# Altium PCB estop12.PcbDoc
Units mm, origin at the board's own origin, x right, y up, seen from the top; angles counter-clockwise.
Board outline 59.94 x 46.23 mm, 2 copper layers (Top Layer, Bottom Layer); 38 components, 12 nets, 101 pads, 0 vias.
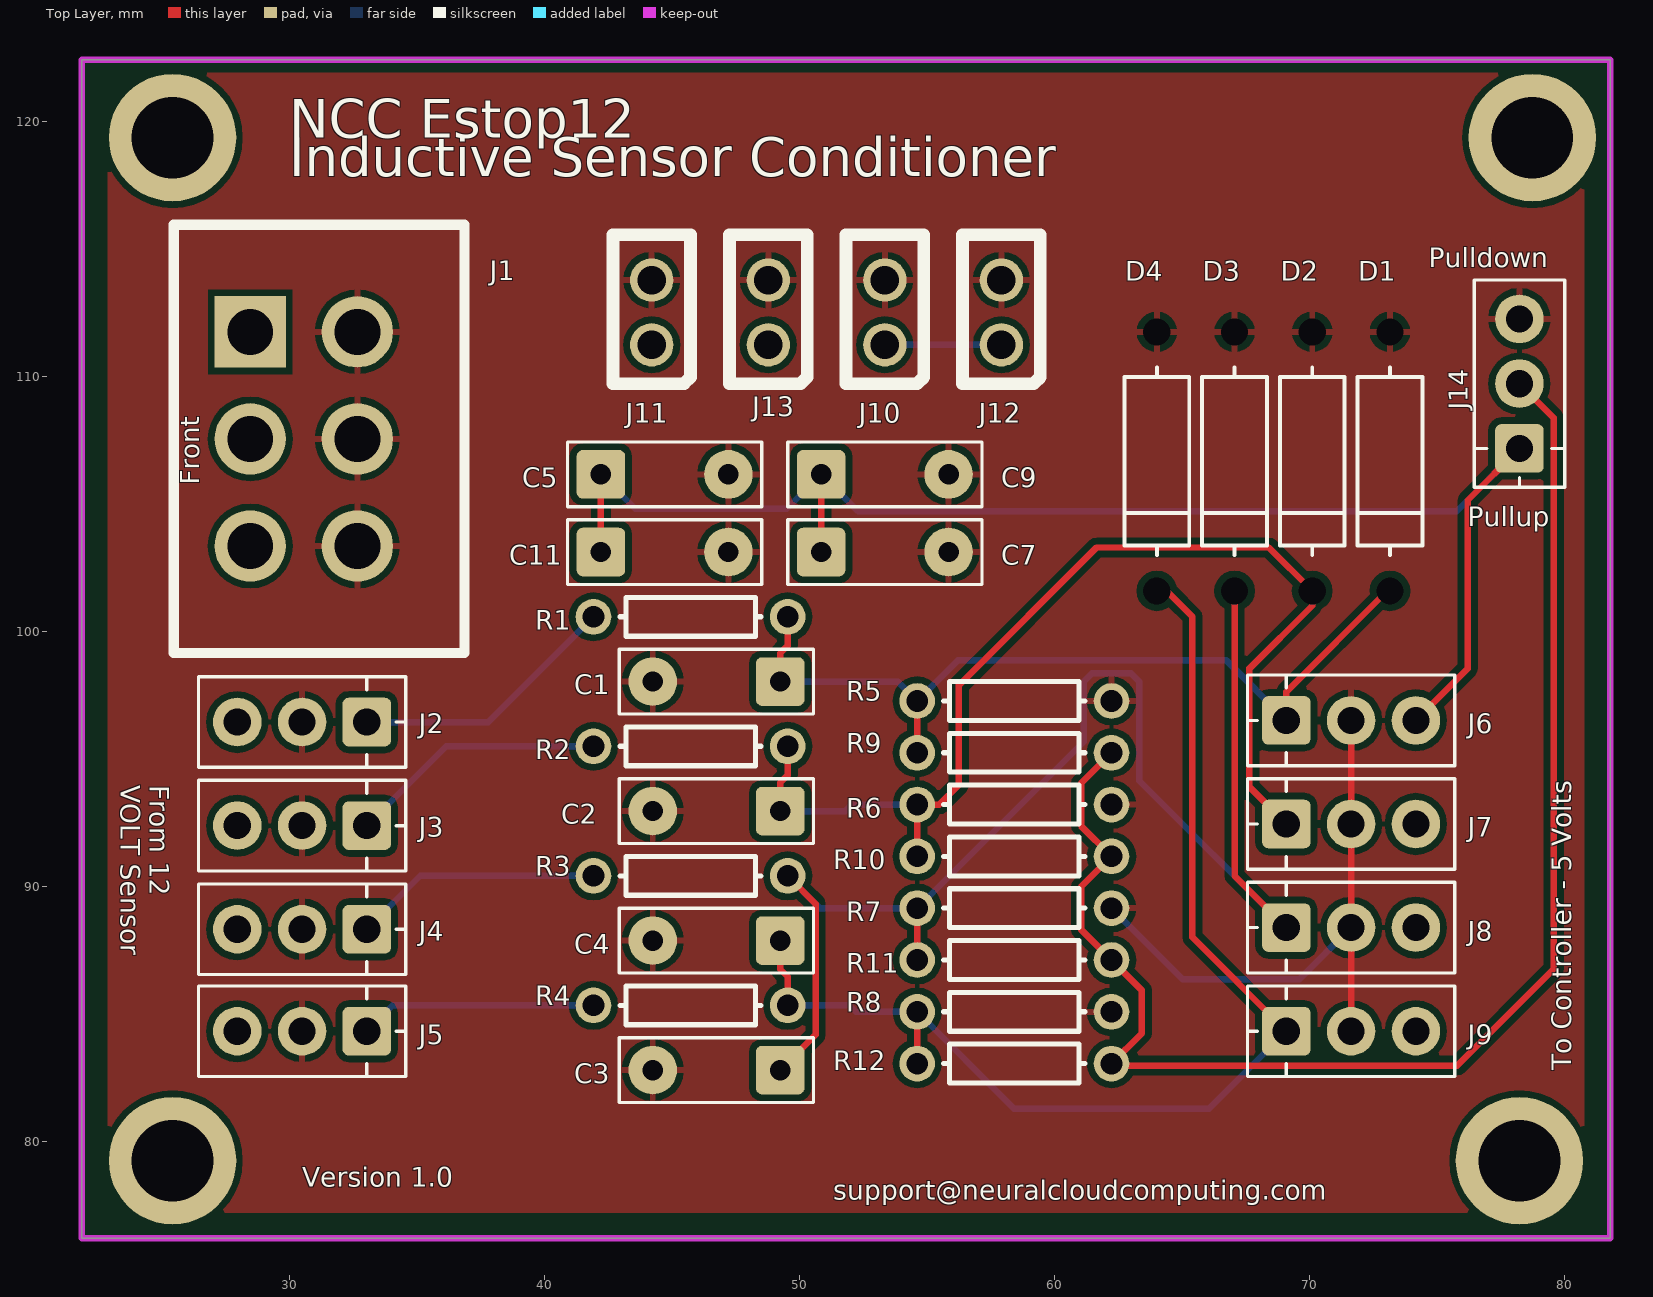
[diagram p0: Top Layer view]
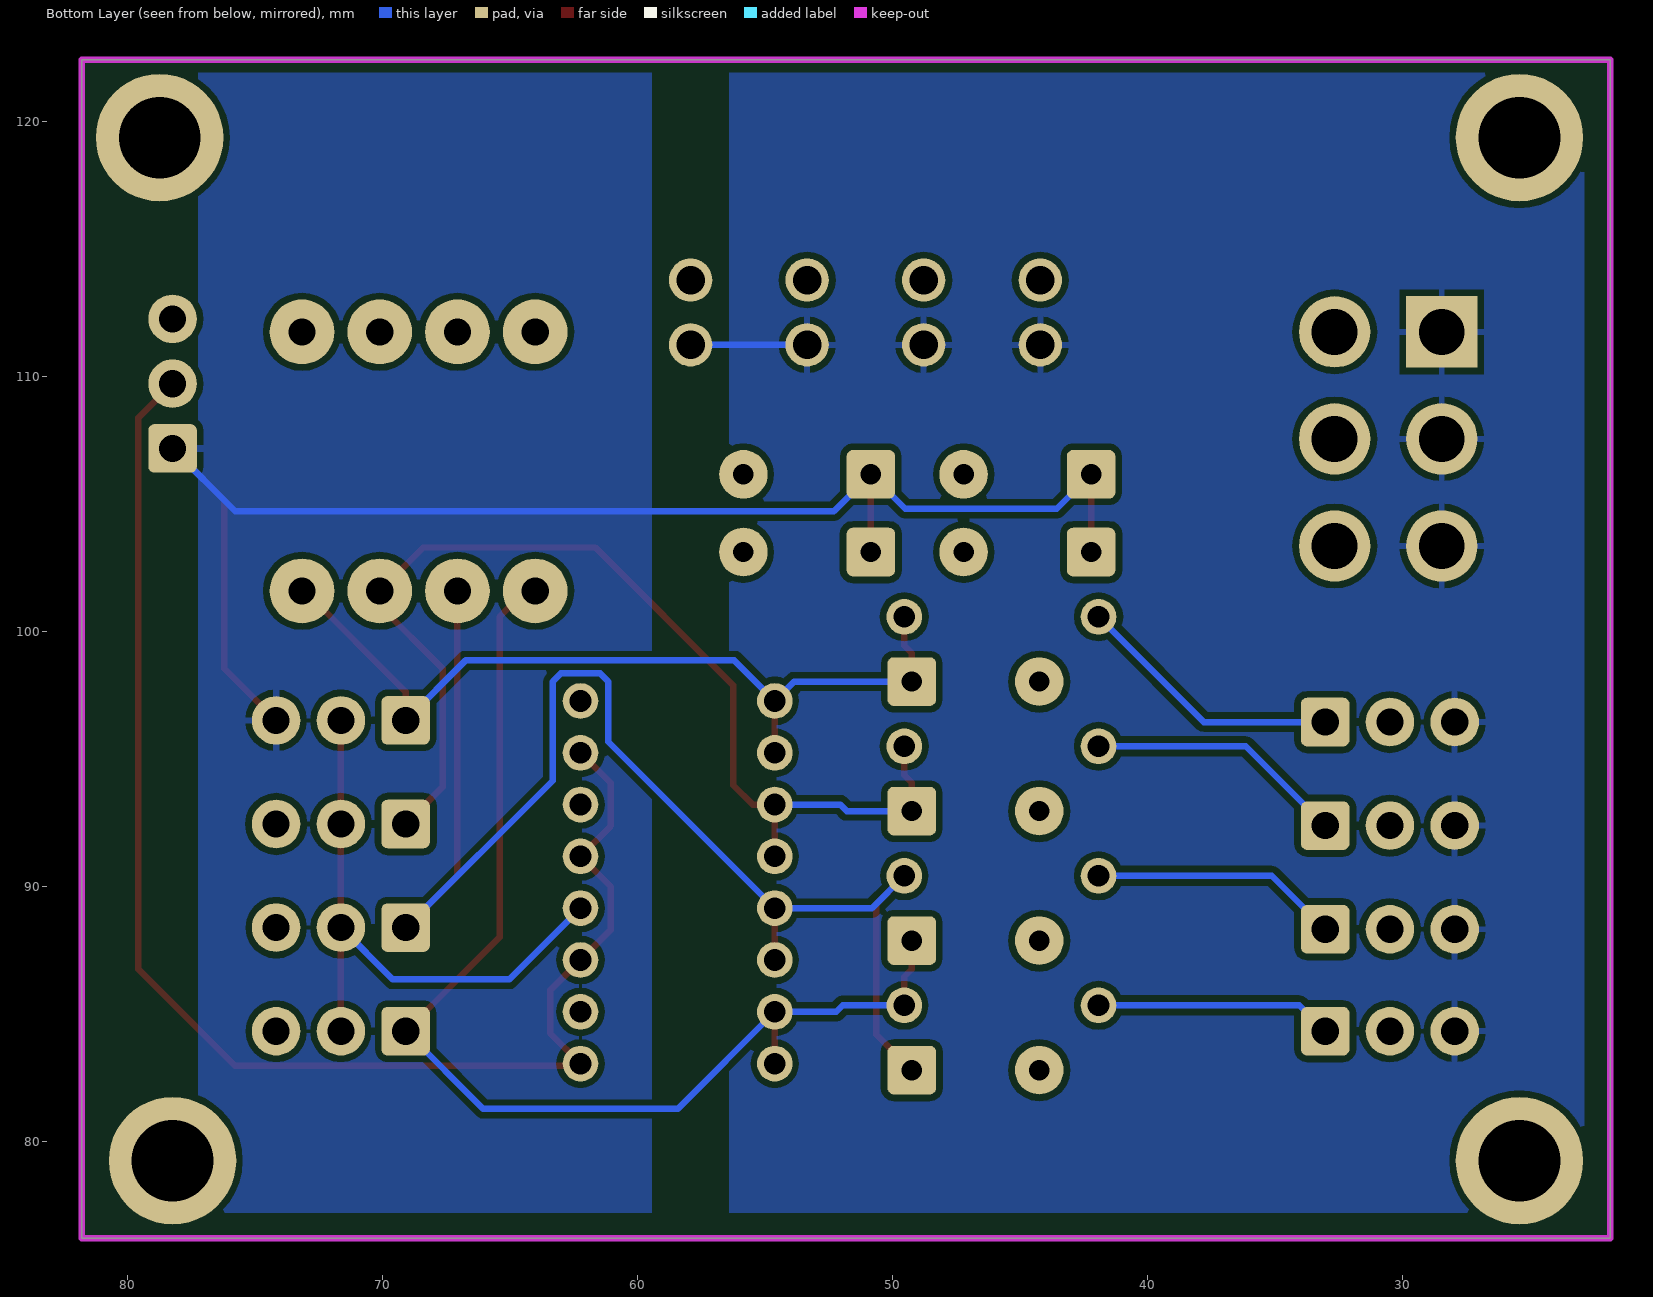
[diagram p1: Bottom Layer view, seen from below]
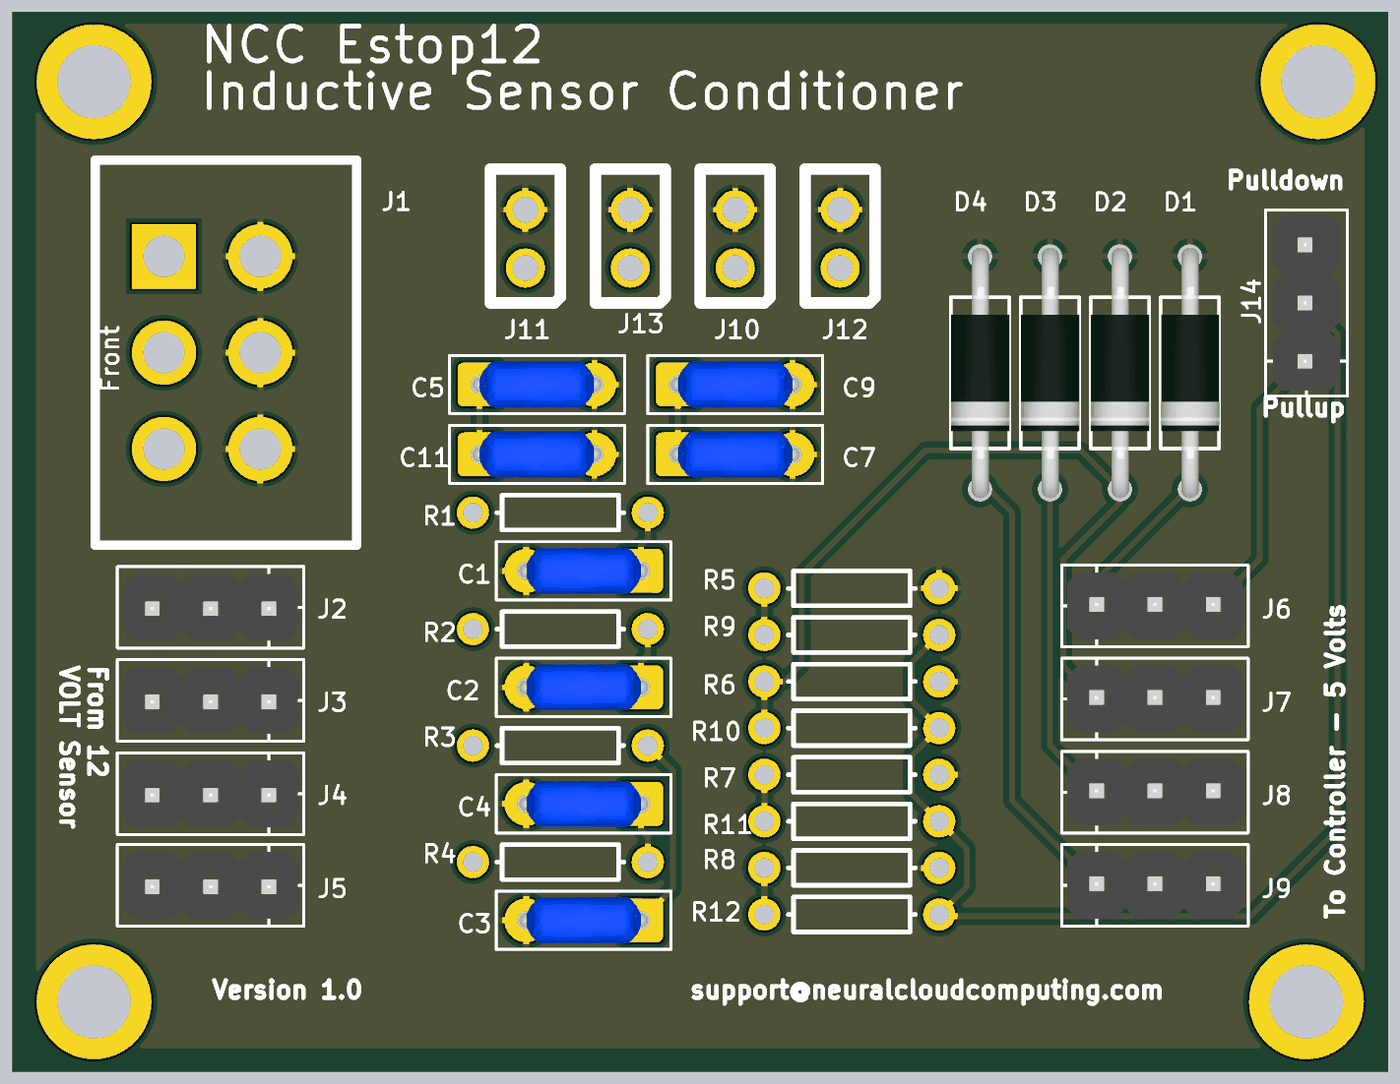
[diagram p2: 3D render of the assembled board from above, using the file's embedded part models]

## Layer stack, top to bottom
Top Solder: solder mask 0.0102, Solder Resist, Dk 3.5
Top Layer: signal copper 0.0356
Dielectric 1: dielectric 0.32, FR-4, Dk 4.8
Bottom Layer: signal copper 0.0356
Bottom Solder: solder mask 0.0102, Solder Resist, Dk 3.5

## Board outline
21.844,122.428 21.844,76.2 81.788,76.2 81.788,122.428

## Design rules (kind name [scope] priority, off if disabled: settings)
Clearance [All] p1: gap=0.254
PolygonConnect [All] p1: connectstyle=Relief reliefconductorwidth=0.254 reliefentries=4 polygonreliefangle="90 Angle" airgapwidth=0.254
RoutingVias [All] p1: holewidth=0.711 width=1.27 viastyle="Through Hole" minholewidth=0.711 minwidth=1.27 maxholewidth=0.711 maxwidth=1.27
SolderMaskExpansion [All] p1: expansion=0.102
Width [All] p1: maxlimit=0.254 minlimit=0.254 preferedwidth=0.254
30 further rules are at their usual default settings.

## Components (designator, comment, footprint, x,y, rotation, side; value= is the part's Value field where it differs from the comment)
C1 "K104K10X7RF5UH5" CAPC500P450250X550 46.736,98.044 r180 top
C2 "K104K10X7RF5UH5" CAPC500P450250X550 46.736,92.964 r180 top
C3 "K104K10X7RF5UH5" CAPC500P450250X550 46.736,82.804 r180 top
C4 "K104K10X7RF5UH5" CAPC500P450250X550 46.736,87.884 r180 top
C5 "K104K10X7RF5UH5" CAPC500P450250X550 44.704,106.172 r0 top
C7 "K104K10X7RF5UH5" CAPC500P450250X550 53.34,103.124 r0 top
C9 "K104K10X7RF5UH5" CAPC500P450250X550 53.34,106.172 r0 top
C11 "K104K10X7RF5UH5" CAPC500P450250X550 44.704,103.124 r0 top
D1 "1N4733ATR" DO-41 73.152,106.68 r180 top
D2 "1N4733ATR" DO-41 70.104,106.68 r180 top
D3 "1N4733ATR" DO-41 67.056,106.68 r180 top
D4 "1N4733ATR" DO-41 64.008,106.68 r180 top
J1 "0455580003" 45558-NP 28.448,111.76 r90 top
J2 "CONN_HEADER_1x3P_0.100in" 1x3POS_HEADER 30.48,96.456 r270 top
J3 "CONN_HEADER_1x3P_0.100in" 1x3POS_HEADER 30.48,92.392 r270 top
J4 "CONN_HEADER_1x3P_0.100in" 1x3POS_HEADER 30.48,88.328 r270 top
J5 "CONN_HEADER_1x3P_0.100in" 1x3POS_HEADER 30.48,84.328 r270 top
J6 "CONN_HEADER_1x3P_0.100in" 1x3POS_HEADER 71.628,96.52 r90 top
J7 "CONN_HEADER_1x3P_0.100in" 1x3POS_HEADER 71.628,92.456 r90 top
J8 "CONN_HEADER_1x3P_0.100in" 1x3POS_HEADER 71.628,88.392 r90 top
J9 "CONN_HEADER_1x3P_0.100in" 1x3POS_HEADER 71.628,84.328 r90 top
J10 "B2B-XH-A(LF)(SN)" 77311-118-02LF 53.34,111.252 r90 top
J11 "B2B-XH-A(LF)(SN)" 77311-118-02LF 44.196,111.252 r90 top
J12 "B2B-XH-A(LF)(SN)" 77311-118-02LF 57.912,111.252 r90 top
J13 "B2B-XH-A(LF)(SN)" 77311-118-02LF 48.768,111.252 r90 top
J14 "CONN_HEADER_1x3P_0.100in" 1x3POS_HEADER 78.232,109.728 r180 top
R1 "15k" AXIAL-0.3 45.72,100.584 r0 top
R2 "15k" AXIAL-0.3 45.72,95.504 r0 top
R3 "15k" AXIAL-0.3 45.72,90.424 r0 top
R4 "15k" AXIAL-0.3 45.72,85.344 r0 top
R5 "10k" AXIAL-0.3 58.42,97.282 r180 top
R6 "10k" AXIAL-0.3 58.42,93.218 r180 top
R7 "10k" AXIAL-0.3 58.42,89.154 r180 top
R8 "10k" AXIAL-0.3 58.42,85.09 r180 top
R9 "3.2K" AXIAL-0.3 58.42,95.25 r0 top
R10 "3.2K" AXIAL-0.3 58.42,91.186 r0 top
R11 "3.2K" AXIAL-0.3 58.42,87.122 r0 top
R12 "3.2K" AXIAL-0.3 58.42,83.058 r0 top

## Footprints (in the part's own frame and the unit in brackets; to place one, negate y for a bottom-side part, rotate by r counter-clockwise, add the part's x,y. Pads: shape width x height; smd on the part's side, far side on the other; paste and mask are expansions set on the pad)
1x3POS_HEADER [mil] "Connector Header, Single-row 3-position, 0.100\" pitch"
  rrect25% 75x75 hole 42: 1(0,100)
  round 75 hole 42: 2(0,0) 3(0,-100)
  silkscreen extent -70,-160 70,160, body extent -57,-150 57,150, height 335
45558-NP [mm] "6 CKT R/A Header Mini Fit Jr PCI-E Power No-Peg"
  rect 2.8x2.8 hole 1.8: 1(0,0)
  round 2.8 hole 1.8: 2(-4.2,0) 3(-8.4,0) 4(0,-4.2) 5(-4.2,-4.2) 6(-8.4,-4.2)
  silkscreen extent -12.6,-8.4 4.2,3
77311-118-02LF [mm] "CONN HEADER 2POS VERT T/H"
  round 1.7 hole 1.12: 1(0,0) 2(2.54,0)
  silkscreen extent -1.52,-1.52 4.32,1.52
AXIAL-0.3 [mm] "Axial Device, Thru-Hole; 2 Leads; 0.3 in Pin Spacing"
  round 1.4 hole 0.85: 1(-3.81,0) 2(3.81,0)
  silkscreen extent -2.77,-0.76 2.77,0.76
CAPC500P450250X550 [mm] "TDK FK24 radial ceramic capacitor"
  round 0.508 on Mech15: 0(0,0)
  rrect25% 1.905x1.905 hole 0.8: 1(-2.5,0)
  round 1.905 hole 0.8: 2(2.5,0)
  silkscreen extent -3.81,-1.27 3.81,1.27, body extent -2.8,-1 2.8,1, height 5.47
DO-41 [mil] "Diode, thru-hole"
  round 0 / inner round 0 / far side round 100 hole 42 unplated: A(0,-200) K(0,200)
  silkscreen extent -50,-145 50,145, body extent -51,-215 50,215, height 100

## Part data
C1 C2 C3 C4 C5 C7 C9 C11: "0.10µF ±10% 50V X7R Ceramic Capacitor -55°C ~ 125°C Through Hole Radial 0.142\" L x 0.091\" W (3.60mm x 2.30mm)"
D1 D2 D3 D4: library part "DIODE ZENER 5.1V 1W DO41", "DIODE ZENER 5.1V 1W DO41"
J2 J3 J4 J5 J6 J7 J8 J9 J14: "Pin Header, THT, Single-row, 2.54mm pitch"
J10 J11 J12 J13: "CONN HEADER XH TOP 2POS 2.5MM  JST B2B-XH-A(LF)(SN)"
R1 R2 R3 R4 R5 R6 R7 R8 R9 R10 R11 R12: library part Res1, "Resistor"

## Free pads (board coordinates)
  round 5 hole 3.2: 0(25.4,79.248) 0(25.4,119.38) 0(78.232,79.248) 1(78.74,119.38)

## Nets (pads, with @x,y where several pads share a name; then routed paths per layer and width w, separated by ;. In a path a pad name is that pad's centre, name@x,y a point inside that pad or via, vN(x,y) a via of type N, cw(c..) or ccw(c..) an arc to the next point about the centre after c; other vN are vias at no path point)
ENDOUT0: C1.1 D1.K J6.1 R1.2 R5.2 R9.1 | length 33.3
  Top Layer w0.254: C1.1 49.236,99.162 49.53,99.456 R1.2 ; R9.1 R5.2 ; J6.1 69.088,97.638 73.05,101.6 D1.K
  Bottom Layer w0.254: C1.1 53.848,98.044 R5.2 56.199,98.871 66.737,98.871 J6.1
ENDOUT1: C2.1 D2.K J7.1 R2.2 R6.2 R10.1 | length 43.6
  Top Layer w0.254: C2.1 49.236,94.082 49.53,94.376 R2.2 ; R10.1 R6.2 55.474,93.218 56.236,93.98 56.236,97.892 61.646,103.302 68.402,103.302 D2.K 70.104,101.021 67.64,98.557 67.64,93.904 J7.1
  Bottom Layer w0.254: C2.1 51.791,92.964 52.045,93.218 R6.2
ENDOUT2: C3.1 D3.K J8.1 R3.2 R7.2 R11.1 | length 56.4
  Top Layer w0.254: C3.1 50.622,84.19 50.622,89.332 R3.2 ; R11.1 R7.2 ; D3.K 67.056,90.424 J8.1
  Bottom Layer w0.254: R3.2 50.8,89.154 R7.2 61.138,95.682 61.138,98.044 61.457,98.363 63.003,98.363 63.322,98.044 63.322,94.158 J8.1
ENDOUT3: C4.1 D4.K J9.1 R4.2 R8.2 R12.1 | length 46.8
  Top Layer w0.254: C4.1 49.236,86.756 49.53,86.462 R4.2 ; R12.1 R8.2 ; D4.K 64.389,101.6 65.405,100.584 65.405,88.011 J9.1
  Bottom Layer w0.254: R4.2 51.943,85.344 52.197,85.09 R8.2 58.42,81.28 66.04,81.28 J9.1
ENDSTOP0: J2.1 R1.1 | length 10.6
  Bottom Layer w0.254: J2.1 37.782,96.456 R1.1
ENDSTOP1: J3.1 R2.1 | length 10.2
  Bottom Layer w0.254: J3.1 36.132,95.504 R2.1
ENDSTOP2: J4.1 R3.1 | length 9.8
  Bottom Layer w0.254: J4.1 35.116,90.424 R3.1
ENDSTOP3: J5.1 R4.1 | length 9.3
  Bottom Layer w0.254: J5.1 34.036,85.344 R4.1
GND: C1.2 C2.2 C3.2 C4.2 C5.2 C7.2 C9.2 C11.2 D1.A D2.A D3.A D4.A J1.4 J1.5 J1.6 J2.2 J3.2 J4.2 J5.2 J6.2 J7.2 J8.2 J9.2 J10.2 J11.2 J12.2 J13.2 J14.3 R5.1 R6.1 R7.1 R8.1 | length 23.6
  Top Layer w0.254: J9.2 J8.2 J7.2 J6.2
  Bottom Layer w0.254: R7.1 65.024,86.36 69.596,86.36 J8.2
PM: J14.2 R9.2 R10.2 R11.2 R12.2 | length 57.7
  Top Layer w0.254: R9.2 61.036,94.056 61.036,92.38 R10.2 61.036,89.992 61.036,88.316 R11.2 63.424,85.928 63.424,84.252 R12.2 62.23,82.982 75.794,82.982 79.578,86.766 79.578,108.382 J14.2
VCC5: C5.1 C7.1 C9.1 C11.1 J6.3 J14.1 | length 57.2
  Top Layer w0.254: C11.1 C5.1 ; C7.1 C9.1 ; J6.3 76.2,98.552 76.2,105.156 J14.1
  Bottom Layer w0.254: C5.1 43.55,104.826 49.494,104.826 C9.1 52.288,104.724 75.768,104.724 J14.1
VIN: J1.1 J1.2 J1.3 J2.3 J3.3 J4.3 J5.3 J10.1 J11.1 J12.1 J13.1 | length 4.6
  Bottom Layer w0.254: J10.1 J12.1
pads on no net: C1.0 C2.0 C3.0 C4.0 C5.0 C7.0 C9.0 C11.0 J7.3 J8.3 J9.3

## Polygon pours and split planes (outlines as drawn)
GND on Top Layer "Top Layer-GND" (solid, remove dead copper, pour order 0): 22.86,121.92 22.86,77.216 80.772,77.216 80.772,121.412 80.264,121.92 22.86,121.92
VCC5 on Bottom Layer "BottomLayerVCC5" (solid, remove dead copper, pour order 4): 59.436,121.92 59.436,77.216 77.216,77.216 77.216,121.92 58.928,121.92
VIN on Bottom Layer "BottomLayerVin" (solid, remove dead copper, pour order 2): 22.86,121.92 22.86,77.216 56.388,77.216 56.388,121.92

## Keep-outs
Keep-Out Layer:
  the board outline again, w0.254

## Silkscreen, mask and mechanical layers (free items; w line width, h text height)
Top Overlay:
  text "NCC Estop12" at 29.972,119.38 h1.52
  text "Inductive Sensor Conditioner" at 29.972,117.856 h1.52
  text "Pulldown" at 74.676,114.3 h0.76
  text "Pullup" at 76.2,104.14 h0.76
  text "From 12  / VOLT Sensor" at 23.368,93.98 h0.76 r270
  text "To Controller - 5 Volts" at 80.264,82.804 h0.76 r90
  text "Version 1.0" at 30.48,78.232 h0.76
  text "support@neuralcloudcomputing.com" at 51.308,77.724 h0.76
  text "support@neuralcloudcomputing.com" at 96.52,2.54 h0.76
  text "support@neuralcloudcomputing.com" at 101.6,-8.128 h0.76

## Dimensions
21.844,126.492 to 81.788,128.016 on Mechanical 15
86.868,122.428 to 85.852,76.2 on Mechanical 15

## Text inside footprints (layer, text, board x,y; h text height)
J1: Top Overlay "Front" at 26.448,105.76 h0.75 r90